# EAGLE board v5_dashbutton_5wayswitch (EAGLE 9.3.0)
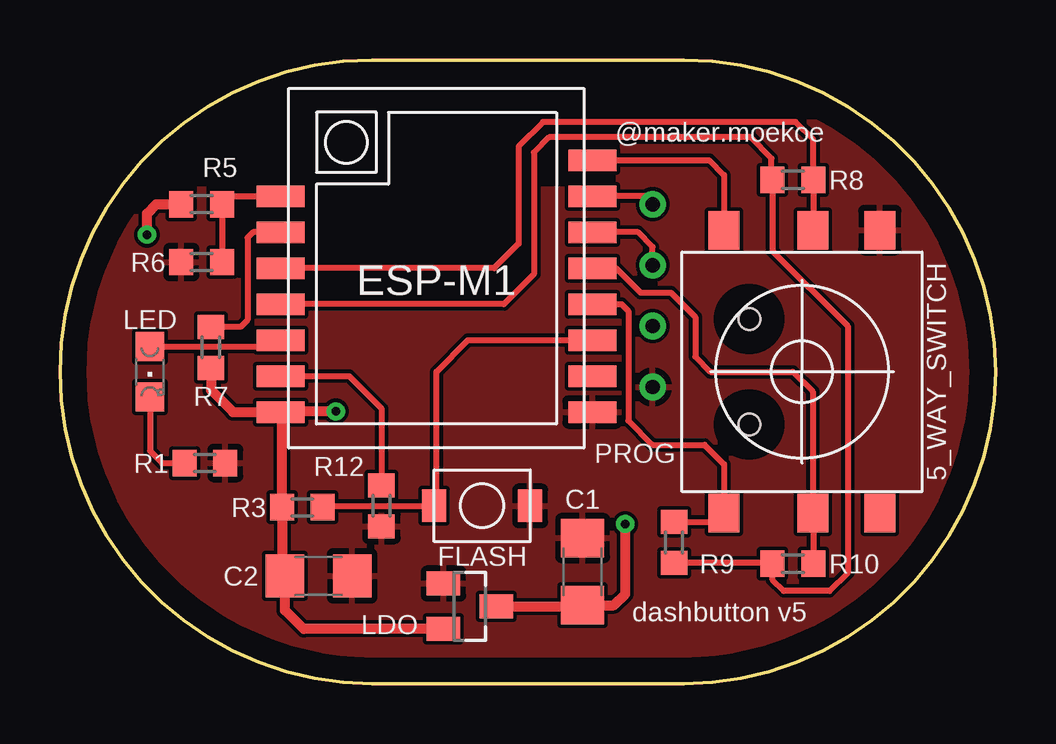
[diagram p0: board, top side]
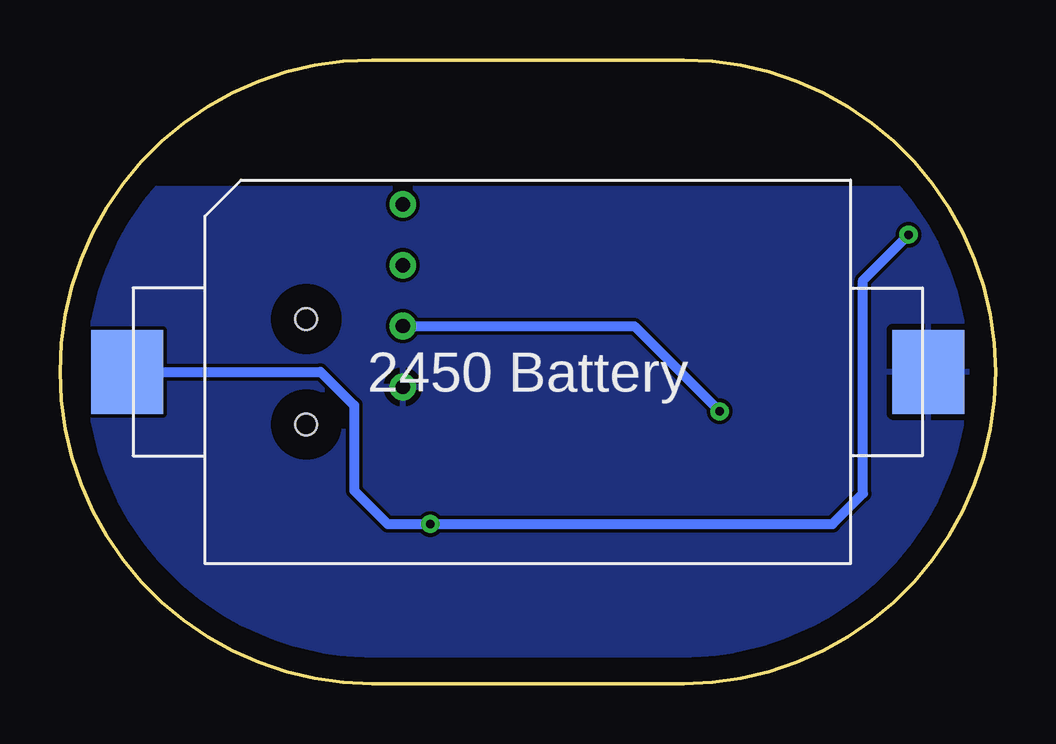
[diagram p1: board, bottom side, seen from below]

Size 39 x 26 mm. Coordinates in mm from the lower left corner, seen from the top.
Outline: 39,13 arc-90 26,0 13,0 arc-90 0,13 arc-90 13,26 26,26 arc-90 39,13
Copper layers (1*16): Top 0.035mm / dielectric 1.5mm / Bottom 0.035mm
Design rules "default": minimum track width 6mil, minimum drill 0.35mm, track to track 6mil, track to pad 6mil, pad to pad 6mil, via to via 6mil, smd to smd 6mil, copper to edge 40mil, drill to drill 6mil, minimum pad ring 10mil, minimum via ring 8mil, stop-mask expansion 4mil, vias tented up to drill 0mil, thermal gap 10mil

## Footprints (pad centres in the part's own frame; a part is rotated, then mirrored left to right if it is on the bottom)
5WAY_TACTILE_SWITCH = smd 1.6 x 1.3: P1 -5.9,3.25; P2 -5.9,0.45; P3 -5.9,-3.25; P4 5.9,3.25; P5 5.9,0.45; P6 5.9,-3.25 | hole 0.9: -2.2,-2.2; 2.2,-2.2
C1206 = smd 1.6 x 1.8: 1 -1.4,0; 2 1.4,0
3X4BUTTON = smd 1 x 1.35: P$1 -2,0; P$2 2,0
SOT23 = smd 1 x 1.4: 1 -0.95,-1.1; 2 0.95,-1.1; 3 0,1.1
CHIPLED_0805 = smd 1.2 x 1.2: A 0,-1.05; C 0,1.05
PROG_CON = drill 0.6: GND 3.81,0; RXD -1.27,0; TXD -3.81,0; VCC 1.27,0
R0603 = smd 1 x 1.1: 1 -0.85,0; 2 0.85,0
2450_BATTERYHOLDER_SMD = smd 3 x 3.5: GND 16.7,0; VCC -16.7,0
ESP8285-M1 = smd 2 x 0.9: ADC -6.5,3; EN -6.5,1.5; GND 6.5,-6; GPIO0 6.5,-3; GPIO2 6.5,-4.5; GPIO4 6.5,-1.5; GPIO5 6.5,0; GPIO12 -6.5,-1.5; GPIO13 -6.5,-3; GPIO14 -6.5,0; GPIO15 -6.5,-4.5; RST 6.5,4.5; RXD 6.5,1.5; TXD 6.5,3; V33 -6.5,-6

## Placement (x,y rotation side)
5_WAY_SWITCH  5WAY_TACTILE_SWITCH  [5WAY_TACTILE_SWITCH]  30.93,13 270 top
C1  1u  [C1206]  21.79,4.66 90 top
C2  1u  [C1206]  10.78,4.49 0 top
FLASH  3X4_SMD_BUTTON  [3X4BUTTON]  17.59,7.41 0 top
LDO  MCP1700  [SOT23]  17.09,3.22 270 top
LED  [CHIPLED_0805]  3.75,13 180 top
PROG  PROG_CON  [PROG_CON]  24.71,16.18 270 top
R1  1k  [R0603]  6.04,9.19 0 top
R3  100k  [R0603]  10.1,7.35 0 top
R5  330k  [R0603]  5.91,19.98 0 top
R6  100k  [R0603]  5.91,17.57 180 top
R7  100k  [R0603]  6.29,14.02 90 top
R8  100k  [R0603]  30.55,21 0 top
R9  100k  [R0603]  25.6,5.89 270 top
R10  100k  [R0603]  30.55,5 180 top
R12  100k  [R0603]  13.4,7.41 90 top
U$2  2450_BATTERYHOLDER_SMD  [2450_BATTERYHOLDER_SMD]  19.5,13 0 bottom
U$3  ESP8285-M1  [ESP8285-M1]  15.69,17.32 0 top

## Library data of the parts
5_WAY_SWITCH FLASH PROG U$2 U$3 = moekoe
C1 C2 = rcl; SPICEPREFIX: C
LDO = linear
LED = adafruit
R1 R3 R5-R10 R12 = rcl; SPICEPREFIX: R

## Nets
4_5WAY_DOWN: 5_WAY_SWITCH.P6 R9.1 U$3.GPIO4
5_5WAY_RIGHT: 5_WAY_SWITCH.P5 R10.1 U$3.GPIO5
12_5WAY_HIGH: R8.1 R9.2 R10.2 U$3.GPIO12
14_5WAY_LEFT: 5_WAY_SWITCH.P2 R8.2 U$3.GPIO14
ADC: R5.2 R6.1 U$3.ADC
GND: 5_WAY_SWITCH.P1 C1.2 C2.2 FLASH.P$2 LDO.1 PROG.GND R1.2 R6.2 R12.1 U$2.GND U$3.GND
GPIO0_PROG: FLASH.P$1 R3.2 U$3.GPIO0
GPIO1: R12.2 U$3.GPIO15
GPIO13_LED: LED.A U$3.GPIO13
N$1: R7.2 U$3.EN
N$3: LED.C R1.1
RESET: 5_WAY_SWITCH.P3 U$3.RST
RXD: PROG.RXD U$3.RXD
TXD: PROG.TXD U$3.TXD
V33: C2.1 LDO.2 PROG.VCC R3.1 R7.1 U$3.V33
VCC: C1.1 LDO.3 R5.1 U$2.VCC

## Tracks (layer width: path | path; a pad name or v marks a point on that pad's centre or on a via)
4_5WAY_DOWN
  Top 0.254: R9.1 27.32,6.74 5_WAY_SWITCH.P6 27.68,9.14 26.87,9.95 24.71,9.95 23.69,10.97 23.69,15.54 23.41,15.82 U$3.GPIO4
5_5WAY_RIGHT
  Top 0.254: R10.1 31.4,7.08 5_WAY_SWITCH.P5 31.38,12.17 30.55,13 27.12,13 26.48,13.63 26.48,15.29 25.47,16.3 24.2,16.3 23.18,17.32 U$3.GPIO5
12_5WAY_HIGH
  Top 0.254: U$3.GPIO12 18.51,15.82 19.75,17.06 19.75,22.14 20.39,22.78 28.77,22.78 29.66,21.89 29.66,21.04 R8.1 29.7,18.04 32.84,14.9 32.84,4.62 32.07,3.86 30.17,3.86 29.7,4.32 R10.2 29.66,5.04 R9.2
14_5WAY_LEFT
  Top 0.254: 5_WAY_SWITCH.P2 31.4,18.92 R8.2 31.4,22.69 30.68,23.41 20.14,23.41 19.12,22.4 19.12,18.33 18.1,17.32 U$3.GPIO14
ADC
  Top 0.254: R6.1 R5.2 7.09,20.32 U$3.ADC
GND
  pour Top: -0.82,20.62 23.31,20.62 23.31,23.41 39.82,23.41 39.82,-0.97 -0.82,-0.97
  pour Bottom: -0.82,20.62 39.82,20.62 39.82,-0.97 -0.82,-0.97
GPIO0_PROG
  Top 0.254: R3.2 11.02,7.41 FLASH.P$1 15.69,7.51 15.69,13 17.01,14.32 U$3.GPIO0
GPIO1
  Top 0.254: U$3.GPIO15 12.06,12.82 13.4,11.48 R12.2
GPIO13_LED
  Top 0.254: LED.A 8.92,14.05 U$3.GPIO13
N$1
  Top 0.254: U$3.EN 8.05,18.82 7.82,18.59 7.82,15.16 7.52,14.87 R7.2
N$3
  Top 0.254: LED.C 3.75,9.7 4.26,9.19 R1.1
RESET
  Top 0.254: U$3.RST 27.07,21.82 27.68,21.2 5_WAY_SWITCH.P3
RXD
  Top 0.254: PROG.RXD 24.71,18.21 24.1,18.82 U$3.RXD
TXD
  Top 0.254: PROG.TXD 24.37,20.32 U$3.TXD
V33  (via drill 0.35)
  Top 0.406: LDO.2 10.16,2.27 9.38,3.05 C2.1 9.25,4.62 R3.1 9.25,11.32 9.22,11.35 | R7.1 6.29,12.24 7.21,11.32 U$3.V33 9.22,11.35 | v11.5,11.35 9.22,11.35
  Bottom 0.406: PROG.VCC 15.05,14.9 v11.5,11.35
VCC  (via drill 0.35)
  Top 0.406: LDO.3 21.74,3.22 C1.1 23.1,3.26 23.56,3.73 v23.56,6.65 | v3.62,18.71 3.62,19.6 4.01,19.98 R5.1
  Bottom 0.406: U$2.VCC 28.14,13 26.74,11.6 26.74,8.05 25.34,6.65 v23.56,6.65 6.8,6.65 5.53,7.92 5.53,16.81 v3.62,18.71

## Text on the board
tNames: @maker.moekoe | dashbutton v5